# Altium PCB LED.PcbDoc (part 2 of 2)
Units mm, origin at the board's own origin, x right, y up, seen from the top; angles counter-clockwise.
Board outline 98.55 x 98.96 mm, 2 copper layers (Top Layer, Bottom Layer); 101 components, 40 nets, 660 pads, 300 vias.
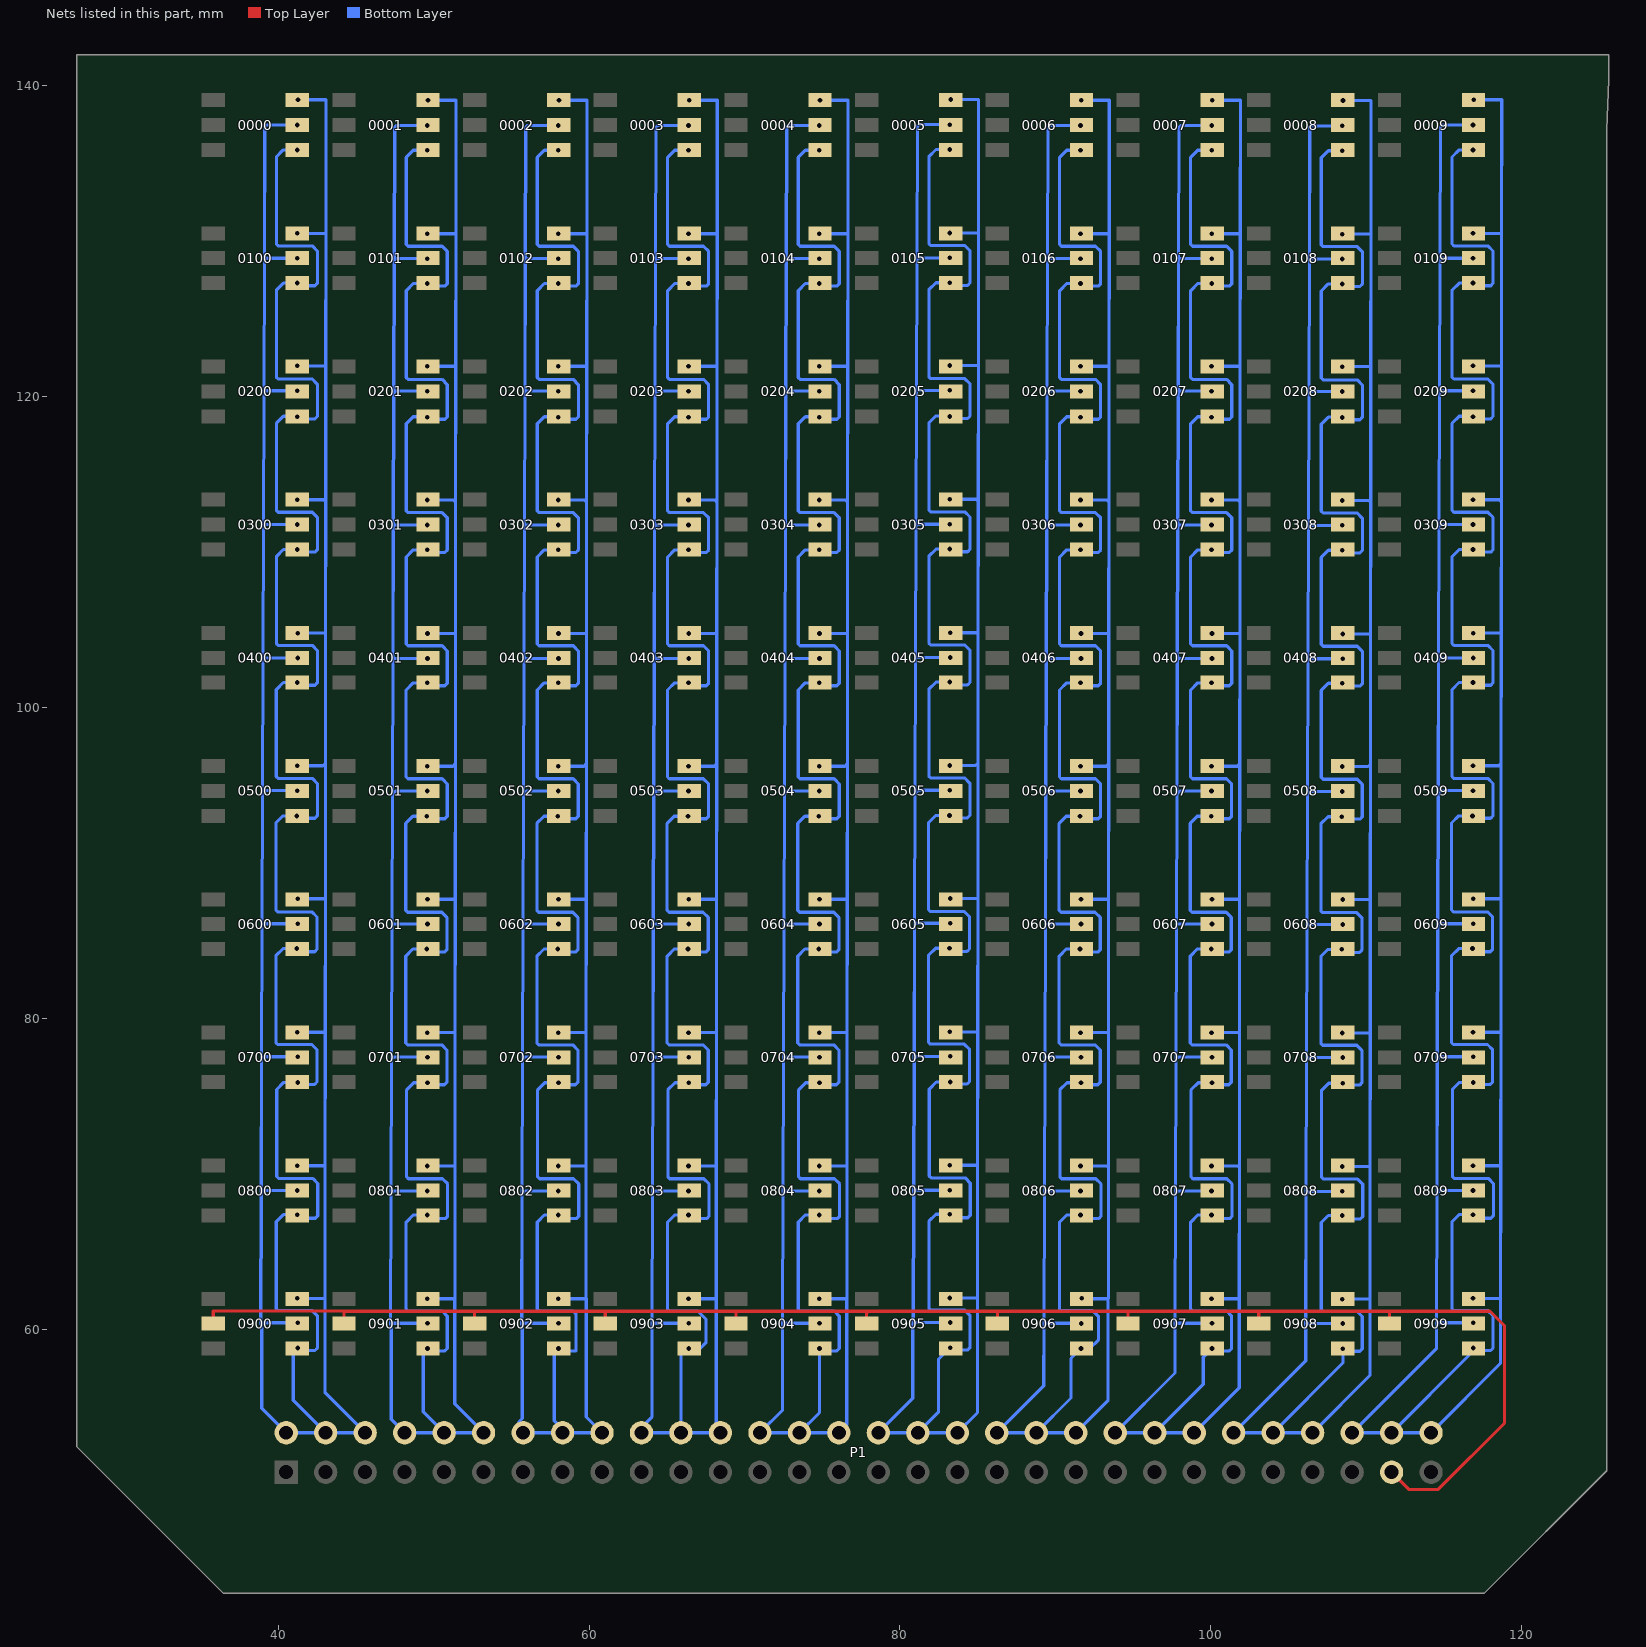
[diagram p2: the nets of this part, all layers, seen from the top]

## Via types
v1: diameter 0.61, hole 0.305, Top Layer to Bottom Layer, 300 vias

## Nets (pads, with @x,y where several pads share a name; then routed paths per layer and width w, separated by ;. In a path a pad name is that pad's centre, name@x,y a point inside that pad or via, vN(x,y) a via of type N, cw(c..) or ccw(c..) an arc to the next point about the centre after c; other vN are vias at no path point) (continued)
A09R: 0900.3 0901.3 0902.3 0903.3 0904.3 0905.3 0906.3 0907.3 0908.3 0909.3 P1.57 | length 107.3
  Top Layer w0.203: 0900.3@35.817,60.355 35.817,61.164 35.814,61.167 44.272,61.154 ; 0901.3@44.226,60.355 44.226,61.108 44.272,61.154 ; 0902.3@52.634,60.355 52.634,61.109 52.68,61.154 ; 0903.3@61.043,60.355 61.043,61.071 60.96,61.154 ; 0904.3@69.452,60.355 69.452,61.146 69.444,61.154 ; 0905.3@77.86,60.355 77.86,61.036 77.978,61.154 ; 0906.3@86.269,60.355 86.269,61.113 86.309,61.154 ; 0907.3@94.677,60.355 94.677,61.143 94.666,61.154 ; 0908.3@103.086,60.355 103.086,61.128 103.111,61.154 ; 0909.3@111.494,60.355 111.494,61.091 ; P1.57@111.633,50.8 112.739,49.694 114.631,49.694 118.897,53.961 118.897,60.223 117.967,61.154 111.494,61.154 103.111,61.154 ; 44.272,61.154 52.68,61.154 ; 52.68,61.154 60.96,61.154 ; 60.96,61.154 69.444,61.154 ; 69.444,61.154 77.978,61.154 ; 77.978,61.154 86.309,61.154 ; 86.309,61.154 94.666,61.154 ; 94.666,61.154 103.111,61.154
C00: 0000.2 0000.4 0000.6 0100.2 0100.4 0100.6 0200.2 0200.4 0200.6 0300.2 0300.4 0300.6 0400.2 0400.4 0400.6 0500.2 0500.4 0500.6 0600.2 0600.4 0600.6 0700.2 0700.4 0700.6 0800.2 0800.4 0800.6 0900.2 0900.4 0900.6 P1.2 P1.4 P1.6 | length 342.9
  Top Layer w0.203: 0000.6@41.224,135.542 41.228,135.545 v1(41.228,135.876)
  Bottom Layer w0.203: 38.875,60.413 38.874,60.337 ; 38.938,60.35 38.938,54.915 P1.2@40.513,53.34 P1.4@43.053,53.34 ; v1@40.97,58.801 40.97,55.423 P1.4@43.053,53.34 ; v1(41.199,84.492) 40.307,84.492 39.849,84.035 39.849,78.439 39.969,78.32 42.161,78.32 42.491,77.99 42.491,75.907 42.339,75.755 v1@41.477,75.755 ; v1(41.199,93.027) 40.307,93.027 39.849,92.569 39.849,86.973 39.969,86.854 42.161,86.854 42.491,86.524 42.491,84.441 42.339,84.289 41.477,84.289 ; v1(41.224,61.988) 43.002,61.988 43.002,62.001 ; v1(41.224,67.373) 40.332,67.373 39.875,66.915 39.875,61.319 39.994,61.2 42.186,61.2 42.517,60.87 42.517,58.787 42.364,58.635 v1@41.503,58.635 ; v1(41.224,68.922) 39.081,68.922 38.903,68.744 ; v1(41.224,70.522) 42.939,70.522 43.015,70.446 ; v1(41.224,79.107) 42.972,79.107 43.023,79.158 ; v1(41.224,94.652) 39.193,94.652 38.99,94.449 ; v1(41.224,96.252) 42.887,96.252 43.039,96.405 ; v1(41.224,101.612) 40.332,101.612 39.875,101.155 39.875,95.559 39.994,95.44 42.186,95.44 42.517,95.109 42.517,93.027 42.364,92.874 41.503,92.874 ; v1(41.224,111.772) 39.15,111.772 39.049,111.67 ; v1(41.224,113.372) 42.928,113.372 43.055,113.245 ; v1(41.224,120.382) 39.179,120.382 39.078,120.281 ; v1(41.224,121.983) 43.063,121.983 ; v1(41.228,127.307) 40.335,127.307 39.878,126.85 39.878,121.254 39.997,121.135 42.19,121.135 42.52,120.805 42.52,118.722 42.367,118.57 41.506,118.57 ; v1(41.228,128.908) 39.123,128.908 39.107,128.892 ; v1(41.228,130.508) 43.036,130.508 43.071,130.542 ; v1(41.228,135.876) 40.335,135.876 39.878,135.419 39.878,129.823 39.997,129.704 42.19,129.704 42.52,129.374 42.52,127.291 42.367,127.139 41.506,127.139 ; v1(41.228,137.477) 39.237,137.477 39.136,137.375 39.107,128.892 ; v1(41.25,60.413) 38.951,60.413 38.874,60.337 ; v1(41.25,75.882) 40.357,75.882 39.9,75.424 39.9,69.828 40.019,69.709 42.212,69.709 42.542,69.379 42.542,67.296 42.389,67.144 41.528,67.144 v1@41.36,67.313 ; v1(41.25,77.533) 39.085,77.533 38.932,77.38 ; v1(41.25,86.092) 38.987,86.092 38.962,86.067 ; v1(41.25,87.693) 43.006,87.693 43.031,87.667 ; v1(41.25,103.187) 39.122,103.187 39.02,103.288 ; v1(41.25,104.787) 42.996,104.787 43.047,104.838 ; v1(41.275,139.102) 43.079,139.102 43.071,130.542 ; v1@41.338,110.169 40.335,110.169 39.878,109.712 39.878,104.116 39.997,103.997 42.19,103.997 42.52,103.667 42.52,101.584 42.367,101.432 41.506,101.432 ; v1@41.338,118.738 40.335,118.738 39.878,118.281 39.878,112.685 39.997,112.566 42.19,112.566 42.52,112.236 42.52,110.153 42.367,110.001 41.506,110.001 ; 38.874,60.337 38.903,68.744 ; 38.903,68.744 38.932,77.38 ; 38.932,77.38 38.962,86.067 ; 38.962,86.067 38.99,94.449 ; 38.99,94.449 39.02,103.288 ; 39.02,103.288 39.049,111.67 ; 39.049,111.67 39.078,120.281 ; 39.078,120.281 39.107,128.892 ; 43.015,70.446 43.015,55.918 P1.6@45.593,53.34 P1.4@43.053,53.34 ; 43.015,70.446 43.023,79.158 ; 43.023,79.158 43.031,87.667 ; 43.031,87.667 43.039,96.405 ; 43.039,96.405 43.047,104.838 ; 43.047,104.838 43.055,113.245 ; 43.055,113.245 43.063,121.983 ; 43.063,121.983 43.071,130.542
  other v1: 41.25,58.787 41.224,110.172 41.224,118.706
C01: 0001.2 0001.4 0001.6 0101.2 0101.4 0101.6 0201.2 0201.4 0201.6 0301.2 0301.4 0301.6 0401.2 0401.4 0401.6 0501.2 0501.4 0501.6 0601.2 0601.4 0601.6 0701.2 0701.4 0701.6 0801.2 0801.4 0801.6 0901.2 0901.4 0901.6 P1.8 P1.10 P1.12 | length 341.7
  Bottom Layer w0.203: 47.231,60.388 47.231,60.311 ; 47.269,60.401 47.269,60.35 ; v1@49.327,58.776 49.327,54.686 P1.10@50.673,53.34 ; v1(49.556,84.467) 48.663,84.467 48.206,84.01 48.206,78.414 48.325,78.295 50.517,78.295 50.848,77.964 50.848,75.882 50.695,75.729 v1@49.834,75.729 ; v1(49.556,93.001) 48.663,93.001 48.206,92.544 48.206,86.948 48.325,86.829 50.517,86.829 50.848,86.499 50.848,84.416 50.695,84.264 49.834,84.264 ; v1(49.581,61.962) 51.359,61.962 ; v1(49.581,67.347) 48.689,67.347 48.231,66.89 48.231,61.294 48.351,61.175 50.543,61.175 50.873,60.845 50.873,58.762 50.721,58.61 v1@49.859,58.61 ; v1(49.581,68.897) 47.437,68.897 47.26,68.719 ; v1(49.581,70.497) 51.295,70.497 51.372,70.421 ; v1(49.581,79.082) 51.329,79.082 51.38,79.133 ; v1(49.581,94.627) 47.55,94.627 47.347,94.424 ; v1(49.581,96.227) 51.243,96.227 51.396,96.379 ; v1(49.581,101.586) 48.689,101.586 48.231,101.129 48.231,95.533 48.351,95.414 50.543,95.414 50.873,95.084 50.873,93.001 50.721,92.849 49.859,92.849 ; v1(49.581,111.746) 47.507,111.746 47.405,111.645 ; v1(49.581,113.347) 51.284,113.347 51.411,113.219 ; v1(49.581,120.357) 47.536,120.357 47.434,120.256 ; v1(49.581,121.957) 51.419,121.957 ; v1(49.584,127.282) 48.692,127.282 48.235,126.825 48.235,121.229 48.354,121.11 50.546,121.11 50.876,120.779 50.876,118.697 50.724,118.544 49.863,118.544 ; v1(49.584,128.882) 47.48,128.882 47.464,128.866 ; v1(49.584,130.482) 51.393,130.482 51.427,130.517 ; v1(49.584,135.851) 48.692,135.851 48.235,135.394 48.235,129.798 48.354,129.679 50.546,129.679 50.876,129.348 50.876,127.266 50.724,127.113 49.863,127.113 ; v1(49.584,137.451) 47.594,137.451 47.492,137.35 47.464,128.866 ; v1(49.606,60.388) 47.307,60.388 47.269,60.35 ; v1(49.606,75.856) 48.714,75.856 48.257,75.399 48.257,69.803 48.376,69.684 50.568,69.684 50.899,69.354 50.899,67.271 50.746,67.119 49.885,67.119 v1@49.716,67.287 ; v1(49.606,77.507) 47.441,77.507 47.289,77.355 ; v1(49.606,86.067) 47.344,86.067 47.318,86.042 ; v1(49.606,87.667) 51.362,87.667 51.387,87.642 ; v1(49.606,103.161) 47.478,103.161 47.377,103.263 ; v1(49.606,104.761) 51.353,104.761 51.403,104.812 ; v1(49.632,139.077) 51.435,139.077 51.427,130.517 ; v1@49.694,110.144 48.692,110.144 48.235,109.687 48.235,104.091 48.354,103.972 50.546,103.972 50.876,103.641 50.876,101.559 50.724,101.406 49.863,101.406 ; v1@49.694,118.713 48.692,118.713 48.235,118.256 48.235,112.66 48.354,112.541 50.546,112.541 50.876,112.21 50.876,110.128 50.724,109.975 49.863,109.975 ; 51.359,61.976 51.359,61.962 ; 47.231,60.311 47.269,60.35 ; 47.231,60.311 47.26,68.719 ; 47.26,68.719 47.289,77.355 ; 47.269,60.35 47.269,54.204 P1.8@48.133,53.34 P1.10@50.673,53.34 ; 47.289,77.355 47.318,86.042 ; 47.318,86.042 47.347,94.424 ; 47.347,94.424 47.377,103.263 ; 47.377,103.263 47.405,111.645 ; 47.405,111.645 47.434,120.256 ; 47.434,120.256 47.464,128.866 ; P1.10@50.673,53.34 P1.12@53.213,53.34 51.359,55.194 51.359,61.962 ; 51.359,61.962 51.372,61.962 51.372,70.421 ; 51.372,70.421 51.38,79.133 ; 51.38,79.133 51.387,87.642 ; 51.387,87.642 51.396,96.379 ; 51.396,96.379 51.403,104.812 ; 51.403,104.812 51.411,113.219 ; 51.411,113.219 51.419,121.957 ; 51.419,121.957 51.427,130.517
  other v1: 49.606,58.762 49.581,110.146 49.581,118.681
C02: 0002.2 0002.4 0002.6 0102.2 0102.4 0102.6 0202.2 0202.4 0202.6 0302.2 0302.4 0302.6 0402.2 0402.4 0402.6 0502.2 0502.4 0502.6 0602.2 0602.4 0602.6 0702.2 0702.4 0702.6 0802.2 0802.4 0802.6 0902.2 0902.4 0902.6 P1.14 P1.16 P1.18 | length 340.7
  Bottom Layer w0.203: 55.664,60.388 55.664,60.311 ; 55.702,60.401 55.702,60.35 ; v1@57.76,58.776 57.76,54.107 58.293,53.574 P1.16@58.293,53.34 ; v1(57.988,84.467) 57.096,84.467 56.639,84.01 56.639,78.414 56.758,78.295 58.95,78.295 59.281,77.964 59.281,75.882 59.128,75.729 v1@58.267,75.729 ; v1(57.988,93.001) 57.096,93.001 56.639,92.544 56.639,86.948 56.758,86.829 58.95,86.829 59.281,86.499 59.281,84.416 59.128,84.264 58.267,84.264 ; v1(58.014,61.962) 59.804,61.962 59.804,70.421 ; v1(58.014,67.347) 57.121,67.347 56.664,66.89 56.664,61.294 56.783,61.175 58.976,61.175 59.153,60.997 59.153,58.61 v1@58.292,58.61 ; v1(58.014,68.897) 55.87,68.897 55.692,68.719 ; v1(58.014,70.497) 59.728,70.497 59.804,70.421 ; v1(58.014,79.082) 59.762,79.082 59.812,79.133 ; v1(58.014,94.627) 55.983,94.627 55.78,94.424 ; v1(58.014,96.227) 59.676,96.227 59.828,96.379 ; v1(58.014,101.586) 57.121,101.586 56.664,101.129 56.664,95.533 56.783,95.414 58.976,95.414 59.306,95.084 59.306,93.001 59.153,92.849 58.292,92.849 ; v1(58.014,111.746) 55.94,111.746 55.838,111.645 ; v1(58.014,113.347) 59.717,113.347 59.844,113.219 ; v1(58.014,120.357) 55.969,120.357 55.867,120.256 ; v1(58.014,121.957) 59.852,121.957 ; v1(58.017,127.282) 57.125,127.282 56.668,126.825 56.668,121.229 56.787,121.11 58.979,121.11 59.309,120.779 59.309,118.697 59.157,118.544 58.296,118.544 ; v1(58.017,128.882) 55.912,128.882 55.896,128.866 ; v1(58.017,130.482) 59.825,130.482 59.86,130.517 ; v1(58.017,135.851) 57.125,135.851 56.668,135.394 56.668,129.798 56.787,129.679 58.979,129.679 59.309,129.348 59.309,127.266 59.157,127.113 58.296,127.113 ; v1(58.017,137.451) 56.027,137.451 55.925,137.35 55.896,128.866 ; v1(58.039,60.388) 55.74,60.388 55.702,60.35 ; v1(58.039,75.856) 57.147,75.856 56.69,75.399 56.69,69.803 56.809,69.684 59.001,69.684 59.331,69.354 59.331,67.271 59.179,67.119 58.318,67.119 v1@58.149,67.287 ; v1(58.039,77.507) 55.874,77.507 55.722,77.355 ; v1(58.039,86.067) 55.777,86.067 55.751,86.042 ; v1(58.039,87.667) 59.795,87.667 59.82,87.642 ; v1(58.039,103.161) 55.911,103.161 55.81,103.263 ; v1(58.039,104.761) 59.785,104.761 59.836,104.812 ; v1(58.065,139.077) 59.868,139.077 59.86,130.517 ; v1@58.127,110.144 57.125,110.144 56.668,109.687 56.668,104.091 56.787,103.972 58.979,103.972 59.309,103.641 59.309,101.559 59.157,101.406 58.296,101.406 ; v1@58.127,118.713 57.125,118.713 56.668,118.256 56.668,112.66 56.787,112.541 58.979,112.541 59.309,112.21 59.309,110.128 59.157,109.975 58.296,109.975 ; 59.817,61.976 59.817,54.356 P1.18@60.833,53.34 P1.16@58.293,53.34 ; 55.664,60.311 55.702,60.35 ; 55.664,60.311 55.692,68.719 ; 55.692,68.719 55.722,77.355 ; 55.702,60.35 55.702,54.26 55.505,54.063 55.505,53.588 P1.14@55.753,53.34 P1.16@58.293,53.34 ; 55.722,77.355 55.751,86.042 ; 55.751,86.042 55.78,94.424 ; 55.78,94.424 55.81,103.263 ; 55.81,103.263 55.838,111.645 ; 55.838,111.645 55.867,120.256 ; 55.867,120.256 55.896,128.866 ; 59.804,70.421 59.812,79.133 ; 59.812,79.133 59.82,87.642 ; 59.82,87.642 59.828,96.379 ; 59.828,96.379 59.836,104.812 ; 59.836,104.812 59.844,113.219 ; 59.844,113.219 59.852,121.957 ; 59.852,121.957 59.86,130.517
  other v1: 58.039,58.762 58.014,110.146 58.014,118.681
C03: 0003.2 0003.4 0003.6 0103.2 0103.4 0103.6 0203.2 0203.4 0203.6 0303.2 0303.4 0303.6 0403.2 0403.4 0403.6 0503.2 0503.4 0503.6 0603.2 0603.4 0603.6 0703.2 0703.4 0703.6 0803.2 0803.4 0803.6 0903.2 0903.4 0903.6 P1.20 P1.22 P1.24 | length 339.8
  Bottom Layer w0.203: 64.046,60.388 64.046,60.311 ; v1@66.142,58.776 65.913,58.547 P1.22@65.913,53.34 ; v1(66.37,84.467) 65.478,84.467 65.021,84.01 65.021,78.414 65.14,78.295 67.332,78.295 67.663,77.964 67.663,75.882 67.51,75.729 v1@66.649,75.729 ; v1(66.37,93.001) 65.478,93.001 65.021,92.544 65.021,86.948 65.14,86.829 67.332,86.829 67.663,86.499 67.663,84.416 67.51,84.264 66.649,84.264 ; v1(66.396,61.962) 68.186,61.962 ; v1(66.396,67.347) 65.503,67.347 65.046,66.89 65.046,61.294 65.165,61.175 66.993,61.175 67.513,60.655 67.513,59.131 67.169,58.787 v1@66.515,58.787 ; v1(66.396,68.897) 64.252,68.897 64.074,68.719 ; v1(66.396,70.497) 68.11,70.497 68.186,70.421 ; v1(66.396,79.082) 68.144,79.082 68.194,79.133 ; v1(66.396,94.627) 64.365,94.627 64.162,94.424 ; v1(66.396,96.227) 68.058,96.227 68.21,96.379 ; v1(66.396,101.586) 65.503,101.586 65.046,101.129 65.046,95.533 65.165,95.414 67.358,95.414 67.688,95.084 67.688,93.001 67.535,92.849 66.674,92.849 ; v1(66.396,111.746) 64.322,111.746 64.22,111.645 ; v1(66.396,113.347) 68.099,113.347 68.226,113.219 ; v1(66.396,120.357) 64.351,120.357 64.249,120.256 ; v1(66.396,121.957) 68.234,121.957 ; v1(66.399,127.282) 65.507,127.282 65.05,126.825 65.05,121.229 65.169,121.11 67.361,121.11 67.691,120.779 67.691,118.697 67.539,118.544 66.678,118.544 ; v1(66.399,128.882) 64.294,128.882 64.278,128.866 ; v1(66.399,130.482) 68.207,130.482 68.242,130.517 ; v1(66.399,135.851) 65.507,135.851 65.05,135.394 65.05,129.798 65.169,129.679 67.361,129.679 67.691,129.348 67.691,127.266 67.539,127.113 66.678,127.113 ; v1(66.399,137.451) 64.409,137.451 64.307,137.35 64.278,128.866 ; v1(66.421,60.388) 64.122,60.388 64.059,60.324 ; v1(66.421,75.856) 65.529,75.856 65.072,75.399 65.072,69.803 65.191,69.684 67.383,69.684 67.713,69.354 67.713,67.271 67.561,67.119 66.7,67.119 v1@66.531,67.287 ; v1(66.421,77.507) 64.256,77.507 64.104,77.355 ; v1(66.421,86.067) 64.159,86.067 64.133,86.042 ; v1(66.421,87.667) 68.177,87.667 68.202,87.642 ; v1(66.421,103.161) 64.293,103.161 64.192,103.263 ; v1(66.421,104.761) 68.167,104.761 68.218,104.812 ; v1(66.447,139.077) 68.25,139.077 68.242,130.517 ; v1@66.509,110.144 65.507,110.144 65.05,109.687 65.05,104.091 65.169,103.972 67.361,103.972 67.691,103.641 67.691,101.559 67.539,101.406 66.678,101.406 ; v1@66.509,118.713 65.507,118.713 65.05,118.256 65.05,112.66 65.169,112.541 67.361,112.541 67.691,112.21 67.691,110.128 67.539,109.975 66.678,109.975 ; 64.046,60.311 64.059,60.324 ; 64.046,60.311 64.074,68.719 ; 64.059,60.324 64.059,54.377 63.373,53.691 P1.20@63.373,53.34 P1.22@65.913,53.34 ; 64.074,68.719 64.104,77.355 ; 64.104,77.355 64.133,86.042 ; 64.133,86.042 64.162,94.424 ; 64.162,94.424 64.192,103.263 ; 64.192,103.263 64.22,111.645 ; 64.22,111.645 64.249,120.256 ; 64.249,120.256 64.278,128.866 ; P1.22@65.913,53.34 P1.24@68.453,53.34 68.453,53.561 68.186,53.828 68.186,61.962 ; 68.186,61.962 68.186,70.421 ; 68.186,70.421 68.194,79.133 ; 68.194,79.133 68.202,87.642 ; 68.202,87.642 68.21,96.379 ; 68.21,96.379 68.218,104.812 ; 68.218,104.812 68.226,113.219 ; 68.226,113.219 68.234,121.957 ; 68.234,121.957 68.242,130.517
  other v1: 66.421,58.762 66.396,110.146 66.396,118.681
C04: 0004.2 0004.4 0004.6 0104.2 0104.4 0104.6 0204.2 0204.4 0204.6 0304.2 0304.4 0304.6 0404.2 0404.4 0404.6 0504.2 0504.4 0504.6 0604.2 0604.4 0604.6 0704.2 0704.4 0704.6 0804.2 0804.4 0804.6 0904.2 0904.4 0904.6 P1.26 P1.28 P1.30 | length 341.2
  Bottom Layer w0.203: 72.453,60.388 72.453,60.311 ; 72.517,60.401 72.517,60.375 72.529,60.388 v1(74.829,60.388) ; v1(74.778,84.467) 73.885,84.467 73.428,84.01 73.428,78.414 73.547,78.295 75.74,78.295 76.07,77.964 76.07,75.882 75.917,75.729 v1@75.056,75.729 ; v1(74.778,93.001) 73.885,93.001 73.428,92.544 73.428,86.948 73.547,86.829 75.74,86.829 76.07,86.499 76.07,84.416 75.917,84.264 75.056,84.264 ; v1(74.803,61.962) 76.581,61.962 ; v1(74.803,67.347) 73.911,67.347 73.454,66.89 73.454,61.294 73.573,61.175 75.765,61.175 76.095,60.845 76.095,58.762 75.943,58.61 v1@75.082,58.61 ; v1(74.803,68.897) 72.66,68.897 72.482,68.719 ; v1(74.803,70.497) 76.517,70.497 76.594,70.421 ; v1(74.803,79.082) 76.551,79.082 76.602,79.133 ; v1(74.803,94.627) 72.772,94.627 72.569,94.424 ; v1(74.803,96.227) 76.465,96.227 76.618,96.379 ; v1(74.803,101.586) 73.911,101.586 73.454,101.129 73.454,95.533 73.573,95.414 75.765,95.414 76.095,95.084 76.095,93.001 75.943,92.849 75.082,92.849 ; v1(74.803,111.746) 72.729,111.746 72.627,111.645 ; v1(74.803,113.347) 76.506,113.347 76.633,113.219 ; v1(74.803,120.357) 72.758,120.357 72.657,120.256 ; v1(74.803,121.957) 76.641,121.957 ; v1(74.806,127.282) 73.914,127.282 73.457,126.825 73.457,121.229 73.576,121.11 75.768,121.11 76.099,120.779 76.099,118.697 75.946,118.544 75.085,118.544 ; v1(74.806,128.882) 72.702,128.882 72.686,128.866 ; v1(74.806,130.482) 76.615,130.482 76.649,130.517 ; v1(74.806,135.851) 73.914,135.851 73.457,135.394 73.457,129.798 73.576,129.679 75.768,129.679 76.099,129.348 76.099,127.266 75.946,127.113 75.085,127.113 ; v1(74.806,137.451) 72.816,137.451 72.715,137.35 72.686,128.866 ; v1(74.829,58.762) 74.829,54.636 P1.28@73.533,53.34 ; v1(74.829,75.856) 73.936,75.856 73.479,75.399 73.479,69.803 73.598,69.684 75.79,69.684 76.121,69.354 76.121,67.271 75.968,67.119 75.107,67.119 v1@74.939,67.287 ; v1(74.829,77.507) 72.663,77.507 72.511,77.355 ; v1(74.829,86.067) 72.566,86.067 72.541,86.042 ; v1(74.829,87.667) 76.584,87.667 76.61,87.642 ; v1(74.829,103.161) 72.7,103.161 72.599,103.263 ; v1(74.829,104.761) 76.575,104.761 76.626,104.812 ; v1(74.854,139.077) 76.657,139.077 76.649,130.517 ; v1@74.916,110.144 73.914,110.144 73.457,109.687 73.457,104.091 73.576,103.972 75.768,103.972 76.099,103.641 76.099,101.559 75.946,101.406 75.085,101.406 ; v1@74.916,118.713 73.914,118.713 73.457,118.256 73.457,112.66 73.576,112.541 75.768,112.541 76.099,112.21 76.099,110.128 75.946,109.975 75.085,109.975 ; 76.581,61.976 76.581,61.962 ; 72.453,60.311 72.453,54.8 P1.26@70.993,53.34 P1.28@73.533,53.34 ; 72.453,60.311 72.482,68.719 ; 72.482,68.719 72.511,77.355 ; 72.511,77.355 72.541,86.042 ; 72.541,86.042 72.569,94.424 ; 72.569,94.424 72.599,103.263 ; 72.599,103.263 72.627,111.645 ; 72.627,111.645 72.657,120.256 ; 72.657,120.256 72.686,128.866 ; P1.28@73.533,53.34 P1.30@76.073,53.34 76.581,53.848 76.581,61.962 ; 76.581,61.962 76.594,61.962 76.594,70.421 ; 76.594,70.421 76.602,79.133 ; 76.602,79.133 76.61,87.642 ; 76.61,87.642 76.618,96.379 ; 76.618,96.379 76.626,104.812 ; 76.626,104.812 76.633,113.219 ; 76.633,113.219 76.641,121.957 ; 76.641,121.957 76.649,130.517
  other v1: 74.803,110.146 74.803,118.681
C05: 0005.2 0005.4 0005.6 0105.2 0105.4 0105.6 0205.2 0205.4 0205.6 0305.2 0305.4 0305.6 0405.2 0405.4 0405.6 0505.2 0505.4 0505.6 0605.2 0605.4 0605.6 0705.2 0705.4 0705.6 0805.2 0805.4 0805.6 0905.2 0905.4 0905.6 P1.32 P1.34 P1.36 | length 342.6
  Bottom Layer w0.203: 80.861,60.439 80.861,60.362 ; 80.975,60.452 80.975,60.438 ; v1(83.185,84.518) 82.293,84.518 81.836,84.06 81.836,78.464 81.955,78.345 84.147,78.345 84.477,78.015 84.477,75.932 84.325,75.78 v1@83.464,75.78 ; v1(83.185,93.052) 82.293,93.052 81.836,92.595 81.836,86.999 81.955,86.88 84.147,86.88 84.477,86.549 84.477,84.467 84.325,84.314 83.464,84.314 ; v1(83.211,62.013) 84.988,62.013 ; v1(83.211,67.398) 82.318,67.398 81.861,66.941 81.861,61.345 81.98,61.226 84.172,61.226 84.503,60.895 84.503,58.813 84.35,58.66 v1@83.489,58.66 ; v1(83.211,68.947) 81.067,68.947 80.889,68.77 ; v1(83.211,70.548) 84.925,70.548 85.001,70.471 ; v1(83.211,79.133) 84.958,79.133 85.009,79.184 ; v1(83.211,94.678) 81.179,94.678 80.976,94.475 ; v1(83.211,96.278) 84.873,96.278 85.025,96.43 ; v1(83.211,101.637) 82.318,101.637 81.861,101.18 81.861,95.584 81.98,95.465 84.172,95.465 84.503,95.135 84.503,93.052 84.35,92.9 83.489,92.9 ; v1(83.211,111.797) 81.137,111.797 81.035,111.695 ; v1(83.211,113.397) 84.914,113.397 85.041,113.27 ; v1(83.211,120.408) 81.165,120.408 81.064,120.306 ; v1(83.211,122.008) 85.049,122.008 ; v1(83.214,127.333) 82.322,127.333 81.864,126.876 81.864,121.28 81.983,121.161 84.176,121.161 84.506,120.83 84.506,118.748 84.354,118.595 83.492,118.595 ; v1(83.214,128.933) 81.109,128.933 81.093,128.917 ; v1(83.214,130.533) 85.022,130.533 85.057,130.568 ; v1(83.214,135.902) 82.322,135.902 81.864,135.445 81.864,129.849 81.983,129.73 84.176,129.73 84.506,129.399 84.506,127.317 84.354,127.164 83.492,127.164 ; v1(83.214,137.502) 81.224,137.502 81.122,137.4 81.093,128.917 ; v1(83.236,58.813) 82.474,58.051 82.474,54.661 P1.34@81.153,53.34 ; v1(83.236,60.438) 80.975,60.438 ; v1(83.236,75.907) 82.344,75.907 81.886,75.45 81.886,69.854 82.006,69.735 84.198,69.735 84.528,69.404 84.528,67.322 84.376,67.169 83.514,67.169 v1@83.346,67.338 ; v1(83.236,77.558) 81.071,77.558 80.918,77.406 ; v1(83.236,86.118) 80.973,86.118 80.948,86.092 ; v1(83.236,87.718) 84.992,87.718 85.017,87.693 ; v1(83.236,103.212) 81.108,103.212 81.006,103.313 ; v1(83.236,104.812) 84.982,104.812 85.033,104.863 ; v1(83.261,139.128) 85.065,139.128 85.057,130.568 ; v1@83.324,110.195 82.322,110.195 81.864,109.737 81.864,104.141 81.983,104.022 84.176,104.022 84.506,103.692 84.506,101.61 84.354,101.457 83.492,101.457 ; v1@83.324,118.764 82.322,118.764 81.864,118.306 81.864,112.711 81.983,112.591 84.176,112.591 84.506,112.261 84.506,110.179 84.354,110.026 83.492,110.026 ; 84.988,62.027 84.988,62.013 ; 80.861,60.362 80.937,60.438 80.975,60.438 ; 80.861,60.362 80.889,68.77 ; 80.889,68.77 80.918,77.406 ; 80.918,77.406 80.948,86.092 ; 80.948,86.092 80.976,94.475 ; 80.975,60.438 80.823,60.286 80.823,55.55 P1.32@78.613,53.34 P1.34@81.153,53.34 ; 80.976,94.475 81.006,103.313 ; 81.006,103.313 81.035,111.695 ; 81.035,111.695 81.064,120.306 ; 81.064,120.306 81.093,128.917 ; P1.34@81.153,53.34 P1.36@83.693,53.34 84.988,54.635 84.988,62.013 ; 84.988,62.013 85.001,62.013 85.001,70.471 ; 85.001,70.471 85.009,79.184 ; 85.009,79.184 85.017,87.693 ; 85.017,87.693 85.025,96.43 ; 85.025,96.43 85.033,104.863 ; 85.033,104.863 85.041,113.27 ; 85.041,113.27 85.049,122.008 ; 85.049,122.008 85.057,130.568
  other v1: 83.211,110.197 83.211,118.731
C06: 0006.2 0006.4 0006.6 0106.2 0106.4 0106.6 0206.2 0206.4 0206.6 0306.2 0306.4 0306.6 0406.2 0406.4 0406.6 0506.2 0506.4 0506.6 0606.2 0606.4 0606.6 0706.2 0706.4 0706.6 0806.2 0806.4 0806.6 0906.2 0906.4 0906.6 P1.38 P1.40 P1.42 | length 342.7
  Bottom Layer w0.203: v1(91.593,84.467) 90.7,84.467 90.243,84.01 90.243,78.414 90.362,78.295 92.554,78.295 92.885,77.964 92.885,75.882 92.732,75.729 v1@91.871,75.729 ; v1(91.593,93.001) 90.7,93.001 90.243,92.544 90.243,86.948 90.362,86.829 92.554,86.829 92.885,86.499 92.885,84.416 92.732,84.264 91.871,84.264 ; v1@91.618,58.778 92.23,58.778 92.786,59.334 92.786,60.808 92.385,61.209 90.353,61.209 90.268,61.294 90.268,66.89 90.726,67.347 v1(91.618,67.347) ; v1(91.618,68.897) 89.474,68.897 89.297,68.719 ; v1(91.618,70.497) 93.332,70.497 93.409,70.421 ; v1(91.618,79.082) 93.366,79.082 93.417,79.133 ; v1(91.618,94.627) 89.587,94.627 89.384,94.424 ; v1(91.618,96.227) 93.28,96.227 93.433,96.379 ; v1(91.618,101.586) 90.726,101.586 90.268,101.129 90.268,95.533 90.388,95.414 92.58,95.414 92.91,95.084 92.91,93.001 92.758,92.849 91.896,92.849 ; v1(91.618,111.746) 89.544,111.746 89.442,111.645 ; v1(91.618,113.347) 93.321,113.347 93.448,113.219 ; v1(91.618,120.357) 89.573,120.357 89.471,120.256 ; v1(91.618,121.957) 93.456,121.957 ; v1(91.621,127.282) 90.729,127.282 90.272,126.825 90.272,121.229 90.391,121.11 92.583,121.11 92.913,120.779 92.913,118.697 92.761,118.544 91.9,118.544 ; v1(91.621,128.882) 89.517,128.882 89.501,128.866 ; v1(91.621,130.482) 93.43,130.482 93.464,130.517 ; v1(91.621,135.851) 90.729,135.851 90.272,135.394 90.272,129.798 90.391,129.679 92.583,129.679 92.913,129.348 92.913,127.266 92.761,127.113 91.9,127.113 ; v1(91.621,137.451) 89.631,137.451 89.529,137.35 89.501,128.866 ; v1(91.643,58.762) 91.008,58.127 91.008,55.575 P1.40@88.773,53.34 ; v1(91.643,75.856) 90.751,75.856 90.294,75.399 90.294,69.803 90.413,69.684 92.605,69.684 92.936,69.354 92.936,67.271 92.783,67.119 91.922,67.119 v1@91.753,67.287 ; v1(91.643,77.507) 89.478,77.507 89.326,77.355 ; v1(91.643,86.067) 89.381,86.067 89.355,86.042 ; v1(91.643,87.667) 93.399,87.667 93.424,87.642 ; v1(91.643,103.161) 89.515,103.161 89.414,103.263 ; v1(91.643,104.761) 93.39,104.761 93.44,104.812 ; v1(91.669,60.362) 91.643,60.388 89.268,60.388 ; v1(91.669,139.077) 93.472,139.077 93.464,130.517 ; v1(91.694,61.988) 91.72,61.962 93.396,61.962 ; v1@91.731,110.144 90.729,110.144 90.272,109.687 90.272,104.091 90.391,103.972 92.583,103.972 92.913,103.641 92.913,101.559 92.761,101.406 91.9,101.406 ; v1@91.731,118.713 90.729,118.713 90.272,118.256 90.272,112.66 90.391,112.541 92.583,112.541 92.913,112.21 92.913,110.128 92.761,109.975 91.9,109.975 ; P1.40@88.773,53.34 P1.42@91.313,53.34 93.396,55.423 93.396,61.962 ; P1.40@88.773,53.34 P1.38@86.233,53.34 89.255,56.362 89.255,56.388 89.268,60.311 89.268,60.388 ; 89.268,60.388 89.297,68.719 ; 89.297,68.719 89.326,77.355 ; 89.326,77.355 89.355,86.042 ; 89.355,86.042 89.384,94.424 ; 89.384,94.424 89.414,103.263 ; 89.414,103.263 89.442,111.645 ; 89.442,111.645 89.471,120.256 ; 89.471,120.256 89.501,128.866 ; 93.396,61.962 93.409,61.975 93.409,70.421 ; 93.409,70.421 93.417,79.133 ; 93.417,79.133 93.424,87.642 ; 93.424,87.642 93.433,96.379 ; 93.433,96.379 93.44,104.812 ; 93.44,104.812 93.448,113.219 ; 93.448,113.219 93.456,121.957 ; 93.456,121.957 93.464,130.517
  other v1: 91.618,110.146 91.618,118.681
C07: 0007.2 0007.4 0007.6 0107.2 0107.4 0107.6 0207.2 0207.4 0207.6 0307.2 0307.4 0307.6 0407.2 0407.4 0407.6 0507.2 0507.4 0507.6 0607.2 0607.4 0607.6 0707.2 0707.4 0707.6 0807.2 0807.4 0807.6 0907.2 0907.4 0907.6 P1.44 P1.46 P1.48 | length 344.1
  Bottom Layer w0.203: v1(100.025,84.467) 99.133,84.467 98.676,84.01 98.676,78.414 98.795,78.295 100.987,78.295 101.318,77.964 101.318,75.882 101.165,75.729 v1@100.304,75.729 ; v1(100.025,93.001) 99.133,93.001 98.676,92.544 98.676,86.948 98.795,86.829 100.987,86.829 101.318,86.499 101.318,84.416 101.165,84.264 100.304,84.264 ; v1(100.051,61.962) 101.732,61.962 ; v1(100.051,67.347) 99.158,67.347 98.701,66.89 98.701,61.294 98.82,61.175 101.013,61.175 101.343,60.845 101.343,58.762 101.19,58.61 v1@100.329,58.61 ; v1(100.051,68.897) 97.907,68.897 97.729,68.719 ; v1(100.051,70.497) 101.765,70.497 101.841,70.421 ; v1(100.051,79.082) 101.799,79.082 101.849,79.133 ; v1(100.051,94.627) 98.02,94.627 97.817,94.424 ; v1(100.051,96.227) 101.713,96.227 101.865,96.379 ; v1(100.051,101.586) 99.158,101.586 98.701,101.129 98.701,95.533 98.82,95.414 101.013,95.414 101.343,95.084 101.343,93.001 101.19,92.849 100.329,92.849 ; v1(100.051,111.746) 97.977,111.746 97.875,111.645 ; v1(100.051,113.347) 101.754,113.347 101.881,113.219 ; v1(100.051,120.357) 98.006,120.357 97.904,120.256 ; v1(100.051,121.957) 101.889,121.957 ; v1(100.054,127.282) 99.162,127.282 98.705,126.825 98.705,121.229 98.824,121.11 101.016,121.11 101.346,120.779 101.346,118.697 101.194,118.544 100.333,118.544 ; v1(100.054,128.882) 97.949,128.882 97.933,128.866 ; v1(100.054,130.482) 101.862,130.482 101.897,130.517 ; v1(100.054,135.851) 99.162,135.851 98.705,135.394 98.705,129.798 98.824,129.679 101.016,129.679 101.346,129.348 101.346,127.266 101.194,127.113 100.333,127.113 ; v1(100.054,137.451) 98.064,137.451 97.962,137.35 97.933,128.866 ; v1(100.076,58.762) 99.517,58.203 99.517,56.464 P1.46@96.393,53.34 ; v1(100.076,60.388) 97.701,60.388 ; v1(100.076,75.856) 99.184,75.856 98.727,75.399 98.727,69.803 98.846,69.684 101.038,69.684 101.368,69.354 101.368,67.271 101.216,67.119 100.355,67.119 v1@100.186,67.287 ; v1(100.076,77.507) 97.911,77.507 97.759,77.355 ; v1(100.076,86.067) 97.814,86.067 97.788,86.042 ; v1(100.076,87.667) 101.832,87.667 101.857,87.642 ; v1(100.076,103.161) 97.948,103.161 97.847,103.263 ; v1(100.076,104.761) 101.822,104.761 101.873,104.812 ; v1(100.102,139.077) 101.905,139.077 101.897,130.517 ; v1@100.164,110.144 99.162,110.144 98.705,109.687 98.705,104.091 98.824,103.972 101.016,103.972 101.346,103.641 101.346,101.559 101.194,101.406 100.333,101.406 ; v1@100.164,118.713 99.162,118.713 98.705,118.256 98.705,112.66 98.824,112.541 101.016,112.541 101.346,112.21 101.346,110.128 101.194,109.975 100.333,109.975 ; 101.833,61.861 101.833,61.962 ; P1.46@96.393,53.34 P1.48@98.933,53.34 101.833,56.24 101.833,61.962 ; P1.46@96.393,53.34 P1.44@93.853,53.34 97.701,57.188 97.701,60.388 ; 97.701,60.388 97.729,68.719 ; 97.729,68.719 97.759,77.355 ; 97.759,77.355 97.788,86.042 ; 97.788,86.042 97.817,94.424 ; 97.817,94.424 97.847,103.263 ; 97.847,103.263 97.875,111.645 ; 97.875,111.645 97.904,120.256 ; 97.904,120.256 97.933,128.866 ; 101.833,61.962 101.841,70.421 ; 101.841,70.421 101.849,79.133 ; 101.849,79.133 101.857,87.642 ; 101.857,87.642 101.865,96.379 ; 101.865,96.379 101.873,104.812 ; 101.873,104.812 101.881,113.219 ; 101.881,113.219 101.889,121.957 ; 101.889,121.957 101.897,130.517
  other v1: 100.051,110.146 100.051,118.681
C08: 0008.2 0008.4 0008.6 0108.2 0108.4 0108.6 0208.2 0208.4 0208.6 0308.2 0308.4 0308.6 0408.2 0408.4 0408.6 0508.2 0508.4 0508.6 0608.2 0608.4 0608.6 0708.2 0708.4 0708.6 0808.2 0808.4 0808.6 0908.2 0908.4 0908.6 P1.50 P1.52 P1.54 | length 344.7
  Bottom Layer w0.203: 106.108,60.362 106.108,60.286 ; 106.184,60.362 v1(108.484,60.362) ; v1(108.433,84.441) 107.54,84.441 107.083,83.984 107.083,78.388 107.202,78.269 109.395,78.269 109.725,77.939 109.725,75.856 109.572,75.704 v1@108.711,75.704 ; v1(108.433,92.976) 107.54,92.976 107.083,92.519 107.083,86.923 107.202,86.804 109.395,86.804 109.725,86.473 109.725,84.391 109.572,84.238 108.711,84.238 ; v1(108.458,61.937) 110.139,61.937 ; v1(108.458,67.322) 107.566,67.322 107.109,66.865 107.109,61.269 107.228,61.15 109.42,61.15 109.75,60.819 109.75,58.737 109.598,58.584 v1@108.737,58.584 ; v1(108.458,68.871) 106.315,68.871 106.137,68.693 ; v1(108.458,70.471) 110.172,70.471 110.249,70.395 ; v1(108.458,79.057) 110.206,79.057 110.257,79.107 ; v1(108.458,94.601) 106.427,94.601 106.224,94.398 ; v1(108.458,96.202) 110.12,96.202 110.273,96.354 ; v1(108.458,101.561) 107.566,101.561 107.109,101.104 107.109,95.508 107.228,95.389 109.42,95.389 109.75,95.058 109.75,92.976 109.598,92.823 108.737,92.823 ; v1(108.458,111.721) 106.384,111.721 106.282,111.619 ; v1(108.458,113.321) 110.161,113.321 110.288,113.194 ; v1(108.458,120.332) 106.413,120.332 106.312,120.23 ; v1(108.458,121.932) 110.296,121.932 ; v1(108.461,127.257) 107.569,127.257 107.112,126.799 107.112,121.203 107.231,121.084 109.423,121.084 109.754,120.754 109.754,118.671 109.601,118.519 108.74,118.519 ; v1(108.461,128.857) 106.357,128.857 106.341,128.841 ; v1(108.461,130.457) 110.27,130.457 110.304,130.492 ; v1(108.461,135.826) 107.569,135.826 107.112,135.368 107.112,129.772 107.231,129.653 109.423,129.653 109.754,129.323 109.754,127.24 109.601,127.088 108.74,127.088 ; v1(108.461,137.426) 106.471,137.426 106.37,137.324 106.341,128.841 ; v1(108.484,75.831) 107.591,75.831 107.134,75.374 107.134,69.778 107.253,69.659 109.445,69.659 109.776,69.328 109.776,67.246 109.623,67.093 108.762,67.093 v1@108.594,67.262 ; v1(108.484,77.482) 106.318,77.482 106.166,77.329 ; v1(108.484,86.042) 106.221,86.042 106.196,86.016 ; v1(108.484,87.642) 110.239,87.642 110.265,87.616 ; v1(108.484,103.136) 106.355,103.136 106.254,103.237 ; v1(108.484,104.736) 110.23,104.736 110.281,104.787 ; v1@108.509,58.496 108.509,57.836 P1.52@104.013,53.34 ; v1(108.509,139.051) 110.312,139.051 110.304,130.492 ; v1@108.571,110.118 107.569,110.118 107.112,109.661 107.112,104.065 107.231,103.946 109.423,103.946 109.754,103.616 109.754,101.533 109.601,101.381 108.74,101.381 ; v1@108.571,118.687 107.569,118.687 107.112,118.23 107.112,112.634 107.231,112.515 109.423,112.515 109.754,112.185 109.754,110.102 109.601,109.95 108.74,109.95 ; P1.52@104.013,53.34 P1.54@106.553,53.34 110.241,57.028 110.241,61.835 110.249,70.395 ; P1.52@104.013,53.34 P1.50@101.473,53.34 106.108,57.975 106.108,60.286 ; 106.108,60.286 106.137,68.693 ; 106.137,68.693 106.166,77.329 ; 106.166,77.329 106.196,86.016 ; 106.196,86.016 106.224,94.398 ; 106.224,94.398 106.254,103.237 ; 106.254,103.237 106.282,111.619 ; 106.282,111.619 106.312,120.23 ; 106.312,120.23 106.341,128.841 ; 110.249,70.395 110.257,79.107 ; 110.257,79.107 110.265,87.616 ; 110.265,87.616 110.273,96.354 ; 110.273,96.354 110.281,104.787 ; 110.281,104.787 110.288,113.194 ; 110.288,113.194 110.296,121.932 ; 110.296,121.932 110.304,130.492
  other v1: 108.484,58.737 108.458,110.121 108.458,118.655
C09: 0009.2 0009.4 0009.6 0109.2 0109.4 0109.6 0209.2 0209.4 0209.6 0309.2 0309.4 0309.6 0409.2 0409.4 0409.6 0509.2 0509.4 0509.6 0609.2 0609.4 0609.6 0709.2 0709.4 0709.6 0809.2 0809.4 0809.6 0909.2 0909.4 0909.6 P1.56 P1.58 P1.60 | length 346.3
  Bottom Layer w0.203: 114.516,60.413 114.516,60.337 ; v1@116.611,58.801 116.611,58.318 P1.58@111.633,53.34 ; v1(116.84,84.492) 115.948,84.492 115.491,84.035 115.491,78.439 115.61,78.32 117.802,78.32 118.132,77.99 118.132,75.907 117.98,75.755 v1@117.119,75.755 ; v1(116.84,93.027) 115.948,93.027 115.491,92.569 115.491,86.973 115.61,86.854 117.802,86.854 118.132,86.524 118.132,84.441 117.98,84.289 117.119,84.289 ; v1(116.866,61.988) 118.643,61.988 118.643,61.891 ; v1(116.866,67.373) 115.973,67.373 115.516,66.915 115.516,61.319 115.635,61.2 117.827,61.2 118.158,60.87 118.158,58.787 118.005,58.635 v1@117.144,58.635 ; v1(116.866,68.922) 114.722,68.922 114.544,68.744 ; v1(116.866,70.522) 118.58,70.522 118.656,70.446 ; v1(116.866,79.107) 118.613,79.107 118.664,79.158 ; v1(116.866,94.652) 114.834,94.652 114.631,94.449 ; v1(116.866,96.252) 118.528,96.252 118.68,96.405 ; v1(116.866,101.612) 115.973,101.612 115.516,101.155 115.516,95.559 115.635,95.44 117.827,95.44 118.158,95.109 118.158,93.027 118.005,92.874 117.144,92.874 ; v1(116.866,111.772) 114.792,111.772 114.69,111.67 ; v1(116.866,113.372) 118.569,113.372 118.696,113.245 ; v1(116.866,120.382) 114.82,120.382 114.719,120.281 ; v1(116.866,121.983) 118.704,121.983 ; v1(116.869,127.307) 115.977,127.307 115.519,126.85 115.519,121.254 115.638,121.135 117.831,121.135 118.161,120.805 118.161,118.722 118.009,118.57 117.147,118.57 ; v1(116.869,128.908) 114.764,128.908 114.748,128.892 ; v1(116.869,130.508) 118.677,130.508 118.712,130.542 ; v1(116.869,135.876) 115.977,135.876 115.519,135.419 115.519,129.823 115.638,129.704 117.831,129.704 118.161,129.374 118.161,127.291 118.009,127.139 117.147,127.139 ; v1(116.869,137.477) 114.879,137.477 114.777,137.375 114.748,128.892 ; v1(116.891,60.413) 114.592,60.413 114.529,60.35 ; v1(116.891,75.882) 115.999,75.882 115.541,75.424 115.541,69.828 115.661,69.709 117.853,69.709 118.183,69.379 118.183,67.296 118.031,67.144 117.169,67.144 v1@117.001,67.313 ; v1(116.891,77.533) 114.726,77.533 114.573,77.38 ; v1(116.891,86.092) 114.628,86.092 114.603,86.067 ; v1(116.891,87.693) 118.647,87.693 118.672,87.667 ; v1(116.891,103.187) 114.763,103.187 114.661,103.288 ; v1(116.891,104.787) 118.637,104.787 118.688,104.838 ; v1(116.916,139.102) 118.72,139.102 118.712,130.542 ; v1@116.979,110.169 115.977,110.169 115.519,109.712 115.519,104.116 115.638,103.997 117.831,103.997 118.161,103.667 118.161,101.584 118.009,101.432 117.147,101.432 ; v1@116.979,118.738 115.977,118.738 115.519,118.281 115.519,112.685 115.638,112.566 117.831,112.566 118.161,112.236 118.161,110.153 118.009,110.001 117.147,110.001 ; P1.58@111.633,53.34 P1.60@114.173,53.34 118.643,57.81 118.643,61.891 ; P1.58@111.633,53.34 P1.56@109.093,53.34 114.529,58.776 114.529,60.35 ; 114.516,60.337 114.529,60.35 ; 114.516,60.337 114.544,68.744 ; 114.544,68.744 114.573,77.38 ; 114.573,77.38 114.603,86.067 ; 114.603,86.067 114.631,94.449 ; 114.631,94.449 114.661,103.288 ; 114.661,103.288 114.69,111.67 ; 114.69,111.67 114.719,120.281 ; 114.719,120.281 114.748,128.892 ; 118.643,61.891 118.648,61.886 118.656,70.446 ; 118.656,70.446 118.664,79.158 ; 118.664,79.158 118.672,87.667 ; 118.672,87.667 118.68,96.405 ; 118.68,96.405 118.688,104.838 ; 118.688,104.838 118.696,113.245 ; 118.696,113.245 118.704,121.983 ; 118.704,121.983 118.712,130.542
  other v1: 116.891,58.787 116.866,110.172 116.866,118.706

## Keep-outs
Keep-Out Layer:
  lines w0.254: 27.051,52.426 27.051,136.957 27.051,141.986 120.675,141.986 125.603,141.986 125.603,140.386 125.476,137.185 125.476,50.902 117.602,43.028 36.449,43.028 31.598,47.879 27.051,52.426

## Silkscreen, mask and mechanical layers (free items; w line width, h text height)
Top Overlay:
  lines w0.254: 33.045,55.88 119.685,55.88 119.685,83.947 119.685,141.249 33.045,141.249 33.045,55.88